# Altium PCB MCU_M_V1.PcbDoc
Units mm, origin at the board's own origin, x right, y up, seen from the top; angles counter-clockwise.
Board outline 26.88 x 19 mm, 2 copper layers (Top Layer, Bottom Layer); 22 components, 48 nets, 148 pads, 67 vias.
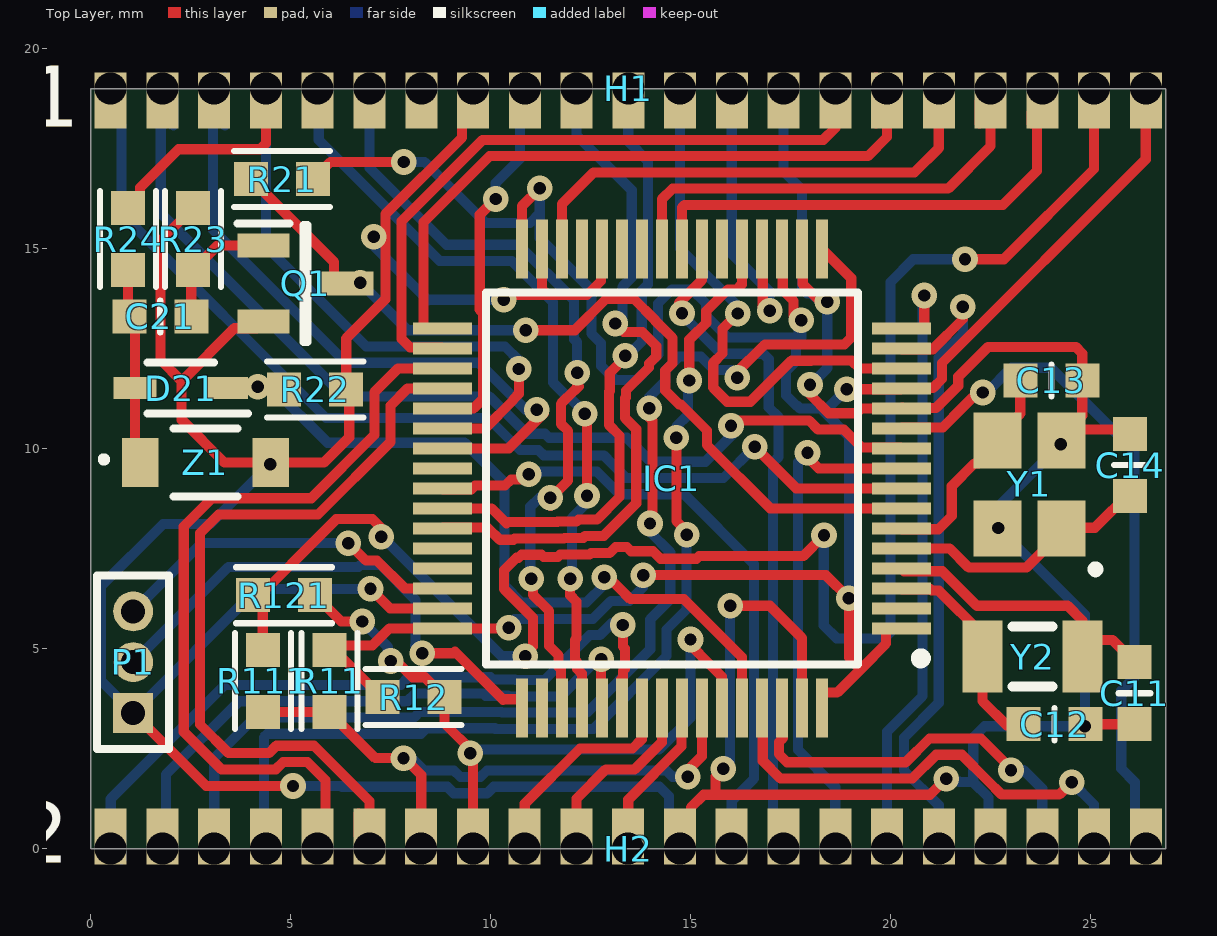
[diagram p0: Top Layer view]
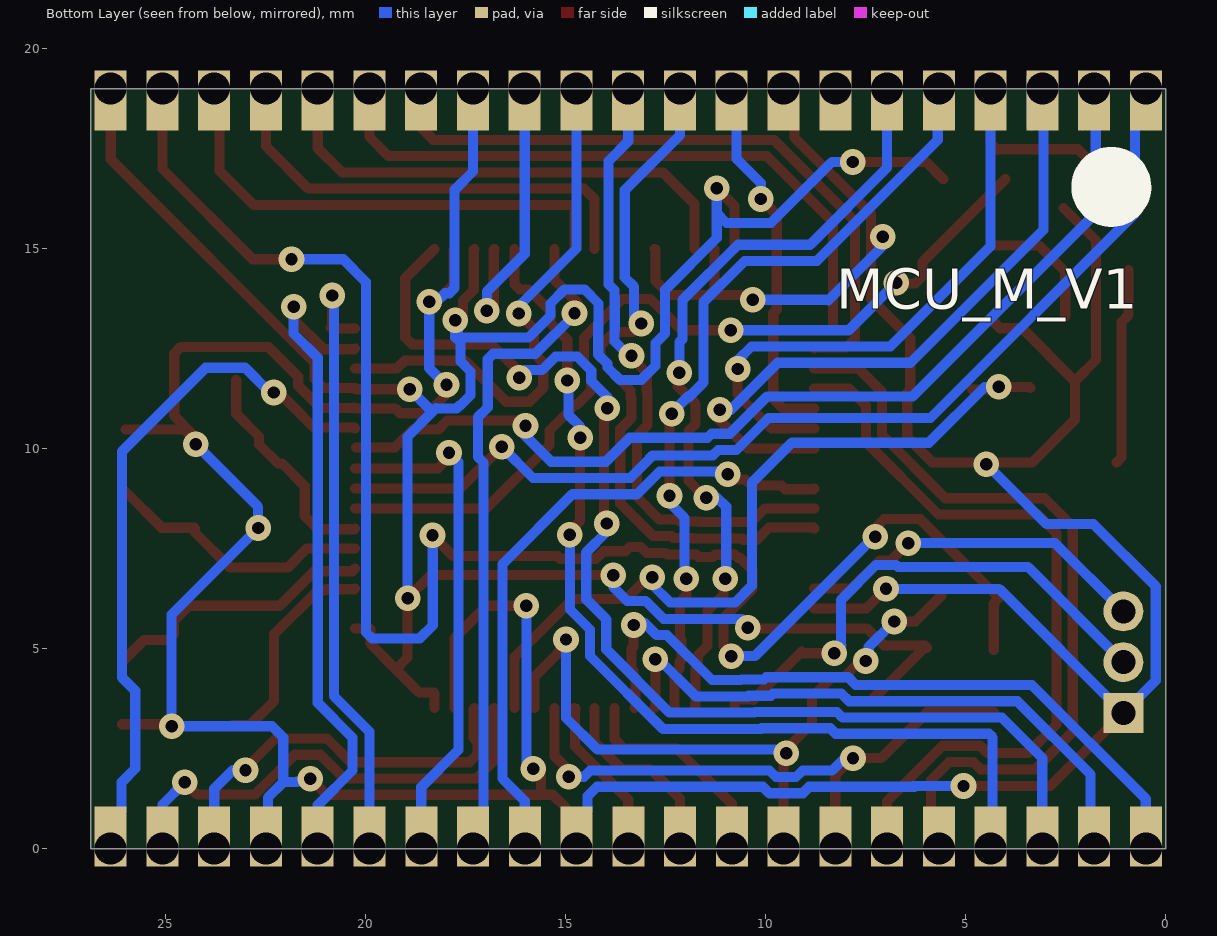
[diagram p1: Bottom Layer view, seen from below]
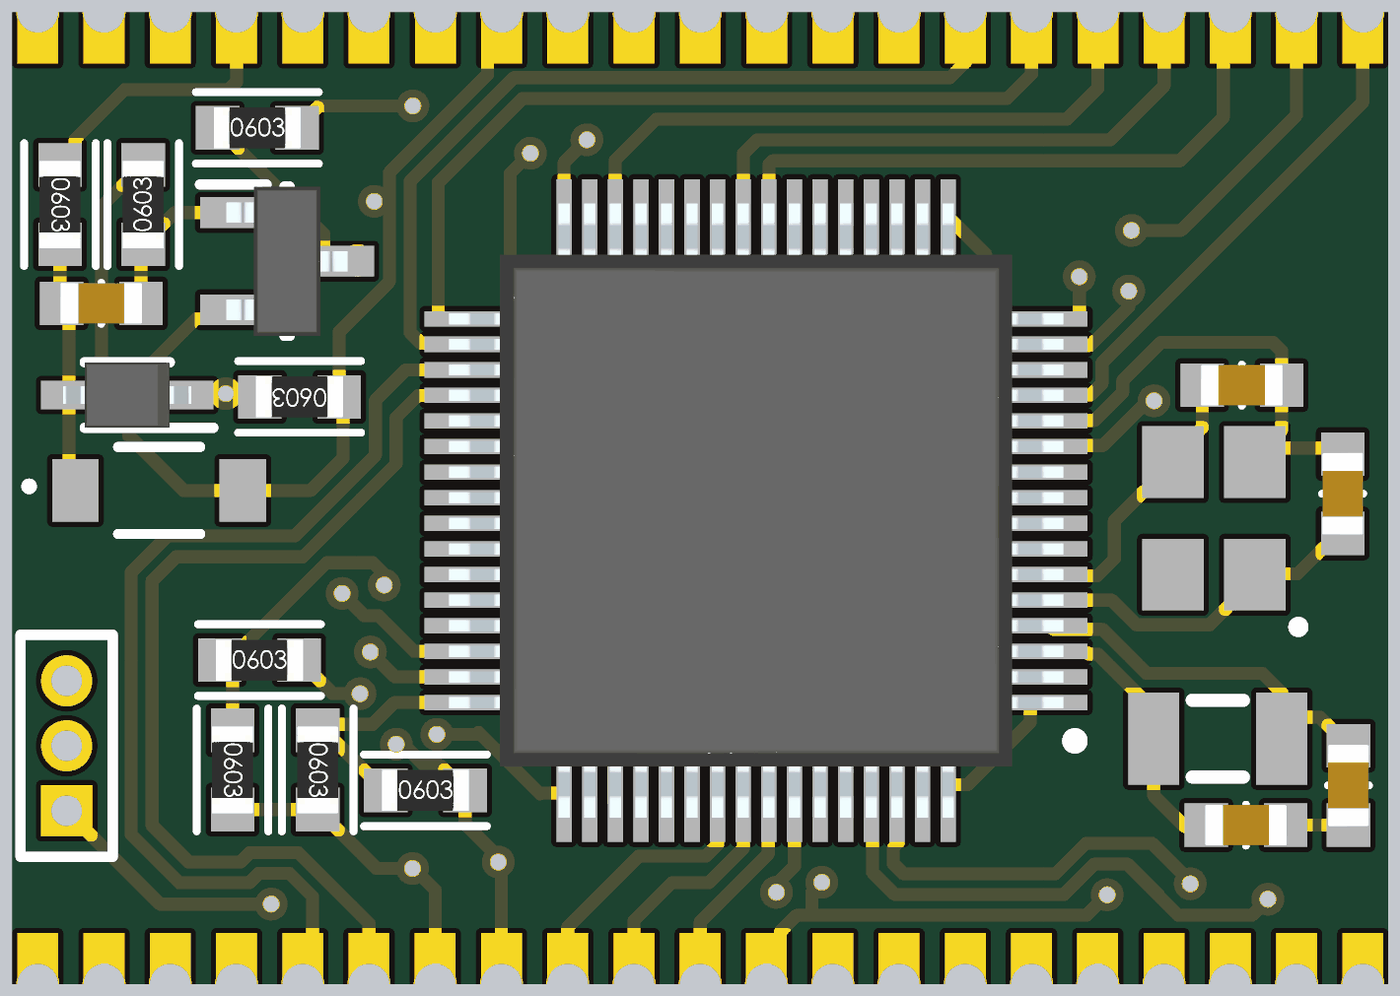
[diagram p2: 3D render of the assembled board from above, using the file's embedded part models]

## Layer stack, top to bottom
Top Solder: solder mask 0.0102, Solder Resist, Dk 3.5
Top Layer: signal copper 0.0356
Dielectric 1: dielectric 0.32, FR-4, Dk 4.8
Bottom Layer: signal copper 0.0356
Bottom Solder: solder mask 0.0102, Solder Resist, Dk 3.5

## Board outline
0,0 26.876,0 26.876,19 0,19

## Design rules (kind name [scope] priority, off if disabled: settings)
AssemblyTestPointUsage SilkToBoardRegionClearance_1 [All] p2:
AssemblyTestPointUsage SilkToBoardRegionClearance [All] p3:
Clearance [All] p1: gap=0.152 ignorepadtopadclearanceinfootprint=FALSE except(0: Arc-Hole Track-Hole SMDPad-Hole THPad-Hole Via-Hole Fill-Hole Poly-Hole Region-Hole Text-Hole)
FanoutControl Fanout_Default [All] p5: bgadir=In bgaviamode=Centered fanoutstyle=Auto fanoutdirection=Alternating viagrid=0.025 // Fanout_Default (Default Rule)
HoleSize [All] p1: absolutevalues=TRUE maxlimit=6.35 minlimit=0.3 maxpercent=80.000 minpercent=20.000
MatchedLengths DiffPair_DIFF100MatchedLengths [InDifferentialPairClass('DIFF100')] p1: tolerance=0.152 checknetsindiffpair=TRUE checkdiffpairvsdiffpair=FALSE checkxsignals=FALSE checkothers=FALSE usedelayunits=FALSE
MinimumSolderMaskSliver [All] p1: minsoldermaskwidth=0.05
MinimumSolderMaskSliver SilkscreenOverComponentPads_2 [All] p2: minsoldermaskwidth=0.254
MinimumSolderMaskSliver SilkToSolderMaskClearance_1 [IsPad] p3: minsoldermaskwidth=0.1
MinimumSolderMaskSliver SilkscreenOverComponentPads_1 [All] p4: minsoldermaskwidth=0.254
MinimumSolderMaskSliver SilkToSolderMaskClearance [IsPad] p5: minsoldermaskwidth=0.254
MinimumSolderMaskSliver SilkscreenOverComponentPads [All] p6: minsoldermaskwidth=0.254
PolygonConnect [All] p1: connectstyle=Direct reliefconductorwidth=0.254 reliefentries=4 polygonreliefangle="90 Angle" airgapwidth=0.254
RoomDefinition MCU_M_V1 [InComponentClass('MCU_M_V1')] p1: confinementstyle=ConfineIn formatcopy=TRUE lockcomponents=FALSE outline -0.076,-0.584 26.962,-0.584 26.962,19.558 -0.076,19.558
RoutingVias [All] p1: holewidth=0.305 width=0.635 viastyle="Through Hole" minholewidth=0.305 minwidth=0.635 maxholewidth=0.711 maxwidth=1.27
SMDNeckDown [All] p1: percent=90.000
SilkToBoardRegionClearance SilkToBoardRegionClearance_2 [All] p1:
SilkToSolderMaskClearance SilkToSolderMaskClearance_2 [IsPad] p1: minsilkscreentomaskgap=0.1 clearancetoexposedcopper=TRUE
SolderMaskExpansion [All] p1: expansion=0.102
Width [All] p1: maxlimit=2.54 minlimit=0.152 preferedwidth=0.254
25 further rules are at their usual default settings.

## Components (designator, comment, footprint, x,y, rotation, side; value= is the part's Value field where it differs from the comment)
C11 "5.6pF" SMD-0603C 26.098,3.886 r180 top
C12 "5.6pF" SMD-0603C 24.096,3.111 r270 top
C13 "5.6pF" SMD-0603C 24.016,11.709 r270 top
C14 "5.6pF" SMD-0603C 25.984,9.588 r0 top
C21 "0.10µF" SMD-0603C 1.74,13.31 r270 top
D21 "BAT60JFILM" SOD2513X117N 2.248,11.517 r180 top
H1 "CASTELLATED 21 pin" "CASTELLATED 21 pin" 26.378,19 r180 top locked
H2 "CASTELLATED 21 pin" "CASTELLATED 21 pin" 0.5,0 r0 top
IC1 "STM32F107RCT6" QFP50P1200X1200X160-64N 14.529,9.258 r180 top
P1 "MHDR1X3" MHDR1X3 1.064,3.392 r90 top
Q1 "IRLML6246TRPBF" SOT95P237X112-3N 5.368,14.133 r0 top
R11 "10k" SMD-0603-RES 5.967,4.19 r180 top
R12 "10k" SMD-0603-RES 8.071,3.791 r270 top
R21 "10k" SMD-0603-RES 4.788,16.739 r270 top
R22 "10k" SMD-0603-RES 5.613,11.481 r90 top
R23 "100k" SMD-0603-RES 2.559,15.24 r0 top
R24 "1k" SMD-0603-RES 0.933,15.24 r180 top
R111 "10k" SMD-0603-RES 4.304,4.19 r180 top
R121 "10k" SMD-0603-RES 4.829,6.337 r270 top
Y1 "NX3225GA-25.000M-STD-CRG-1" NX3225SA_1 23.47,9.106 r90 top
Y2 "NX3215SA-32.768K-STD-MUA-8" NX3215SA 23.546,4.801 r0 top
Z1 "BZT52-C3V6J" SOD123 2.87,9.652 r0 top

## Footprints (in the part's own frame and the unit in brackets; to place one, negate y for a bottom-side part, rotate by r counter-clockwise, add the part's x,y. Pads: shape width x height; smd on the part's side, far side on the other; paste and mask are expansions set on the pad)
"CASTELLATED 21 pin" [mm]
  rect 0.8x1.4 / inner rect 0.8x1.5 / far side rect 0.8x1.5 hole 0.8 copper offset 0,0.3: 1(0,0) 2(1.294,0) 3(2.587,0) 4(3.881,0) 5(5.175,0) 6(6.469,0) 7(7.762,0) 8(9.056,0) 9(10.35,0) 10(11.644,0) 11(12.938,0) 12(14.232,0) 13(15.526,0) 14(16.82,0) 15(18.114,0) 16(19.408,0) 17(20.702,0) 18(21.996,0) 19(23.29,0) 20(24.584,0) 21(25.878,0)
MHDR1X3 [mm] "Connector; Header; 3 Position"
  rect 1x1 hole 0.6: 1(0,0)
  round 1 hole 0.6: 2(1.27,0) 3(2.54,0)
  silkscreen extent -0.9,-0.9 3.44,0.9
NX3215SA [mm]
  rect 1x1.8 smd: 1(-1.25,0) 2(1.25,0)
  silkscreen extent -0.5,-0.75 0.5,0.75
NX3225SA_1 [mm]
  rect 1.4x1.2 smd: 1(-1.1,-0.8) 2(1.1,-0.8) 3(1.1,0.8) 4(-1.1,0.8)
  silkscreen extent -2.19,-1.72 -2.05,-1.58
QFP50P1200X1200X160-64N [mm]
  rect 1.475x0.3 smd: 1(-5.738,3.75) 2(-5.738,3.25) 3(-5.738,2.75) 4(-5.738,2.25) 5(-5.738,1.75) 6(-5.738,1.25) 7(-5.738,0.75) 8(-5.738,0.25) 9(-5.738,-0.25) 10(-5.738,-0.75) 11(-5.738,-1.25) 12(-5.738,-1.75) 13(-5.738,-2.25) 14(-5.738,-2.75) 15(-5.738,-3.25) 16(-5.738,-3.75) 33(5.738,-3.75) 34(5.738,-3.25) 35(5.738,-2.75) 36(5.738,-2.25) 37(5.738,-1.75) 38(5.738,-1.25) 39(5.738,-0.75) 40(5.738,-0.25) 41(5.738,0.25) 42(5.738,0.75) 43(5.738,1.25) 44(5.738,1.75) 45(5.738,2.25) 46(5.738,2.75) 47(5.738,3.25) 48(5.738,3.75)
  rect 0.3x1.475 smd: 17(-3.75,-5.738) 18(-3.25,-5.738) 19(-2.75,-5.738) 20(-2.25,-5.738) 21(-1.75,-5.738) 22(-1.25,-5.738) 23(-0.75,-5.738) 24(-0.25,-5.738) 25(0.25,-5.738) 26(0.75,-5.738) 27(1.25,-5.738) 28(1.75,-5.738) 29(2.25,-5.738) 30(2.75,-5.738) 31(3.25,-5.738) 32(3.75,-5.738) 49(3.75,5.738) 50(3.25,5.738) 51(2.75,5.738) 52(2.25,5.738) 53(1.75,5.738) 54(1.25,5.738) 55(0.75,5.738) 56(0.25,5.738) 57(-0.25,5.738) 58(-0.75,5.738) 59(-1.25,5.738) 60(-1.75,5.738) 61(-2.25,5.738) 62(-2.75,5.738) 63(-3.25,5.738) 64(-3.75,5.738)
  silkscreen extent -6.35,-4.65 4.65,4.65, body extent -6,-6 6,6, height 1.6
SMD-0603-RES [mm]
  rect 0.85x0.85 smd: 1(0,0.775) 2(0,-0.775)
  silkscreen extent -0.7,-1.2 0.7,1.2, body extent -0.4,-0.85 0.4,0.85, height 0.56
SMD-0603C [mm]
  rect 0.85x0.85 smd: 1(0,0.775) 2(0,-0.775)
  silkscreen extent -0.4,0 0.4,0, body extent -0.4,-0.8 0.4,0.8, height 0.9
SOD123 [mm]
  rect 0.91x1.22 smd: 1(-1.635,0) 2(1.635,0)
  silkscreen extent -2.59,-0.85 0.8,0.85
SOD2513X117N [mm]
  rect 1.085x0.55 smd: 1(-1.14,0) 2(1.14,0)
  silkscreen extent -1.68,-0.64 0.83,0.64, body extent -1.25,-0.64 1.25,0.64, height 1.17
SOT95P237X112-3N [mm]
  rect 1.3x0.6 smd: 1(-1.05,0.95) 2(-1.05,-0.95) 3(1.05,0)
  silkscreen extent -1.7,-1.46 0.05,1.5, body extent -1.18,-1.46 1.18,1.46, height 1.12

## Part data
C11 C12 C13 C14: library part GRM1885C1H5R6CA01D, "CAP CER 5.6PF 50V NP0 0603", Digi-Key Part Number=490-12723-1-ND, Manufacturer="Murata Electronics North America", Operating Temperature="-55°C ~ 125°C", Package / Case="0603 (1608 Metric)", Ratings=-, Supplier Part Number 1=81-GRM1885C1H5R6CA1D, Temperature Coefficient="C0G, NP0", Tolerance=±0.25pF, Voltage=50V, @ qty=0, Applications="General Purpose", Datasheets=http://www.murata.com/~/media/webrenewal/support/library/catalog/products/capacitor/mlcc/c02e.pdf, Factory Stock=0, Features=-, Height - Seated (Max)=-, Image=//media.digikey.com/Renders/Murata%20Renders/ZRB-SERIES-0402.jpg, Lead Spacing=-, Lead Style=-, Minimum Quantity=1, Mounting Type="Surface Mount, MLCC", Packaging="Cut Tape (CT)", Part Number=GRM1885C1H5R6CA01D, Part Status=Active, Quantity Available=10409, Series=GRM, Size / Dimension="0.063\" L x 0.031\" W (1.60mm x 0.80mm)", Supplier 1=Mouser, Thickness (Max)="0.035\" (0.90mm)", Unit Price (USD)=0.12
C21: library part GCJ188R71H104KA12D, "CAP CER 0.1UF 50V X7R 0603", Digi-Key Part Number=490-5798-1-ND, Manufacturer="Murata Electronics North America", Operating Temperature="-55°C ~ 125°C", Package / Case="0603 (1608 Metric)", Ratings=AEC-Q200, Supplier Part Number 1=81-GCJ188R71H104KA2D, Temperature Coefficient=X7R, Tolerance=±10%, Voltage=50V, @ qty=0, Applications="Automotive, Boardflex Sensitive", Datasheets=http://www.murata.com/~/media/webrenewal/support/library/catalog/products/capacitor/mlcc/c03e.ashx, Factory Stock=0, Features="Soft Termination", Height - Seated (Max)=-, Image=//media.digikey.com/Renders/Murata%20Renders/0603%28LQG18%29.jpg, Lead Spacing=-, Lead Style=-, Minimum Quantity=1, Mounting Type="Surface Mount, MLCC", Packaging="Cut Tape (CT)", Part Number=GCJ188R71H104KA12D, Part Status=Active, Quantity Available=163695, Series=GCJ, Size / Dimension="0.063\" L x 0.031\" W (1.60mm x 0.80mm)", Supplier 1=Mouser, Thickness (Max)="0.035\" (0.90mm)", Unit Price (USD)=0.12
D21: "Diode", Manufacturer_Name=STMicroelectronics, Mouser2 Part Number=511-BAT60JFILM, Datasheet Link=https://componentsearchengine.com/Datasheets/1/BAT60JFILM.pdf, Height=1.17mm, Manufacturer_Part_Number=BAT60JFILM, Mouser2 Price/Stock=https://www.mouser.com/Search/Refine.aspx?Keyword=511-BAT60JFILM, Supplier 1=Mouser, Supplier Part Number 1=511-BAT60JFILM
IC1: "Integrated Circuit", Manufacturer_Name=STMicroelectronics, Mouser2 Part Number=511-STM32F107RCT6, Datasheet Link=https://componentsearchengine.com/Datasheets/1/STM32F107RCT6.pdf, Height=1.6mm, Manufacturer_Part_Number=STM32F107RCT6, Mouser2 Price/Stock=https://www.mouser.com/Search/Refine.aspx?Keyword=511-STM32F107RCT6, Supplier 1=Mouser, Supplier Part Number 1=511-STM32F107RCT6
P1: "Header, 3-Pin", LatestRevisionDate=17-Jul-2002, LatestRevisionNote="Re-released for DXP Platform.", Publisher="Altium Limited"
Q1: "MOSFET (N-Channel)", Manufacturer_Name=Infineon, Supplier Part Number 1=942-IRLML6246TRPBF, Height=1.12mm, Manufacturer_Part_Number=IRLML6246TRPBF, Supplier 1=Mouser
R11 R12 R21 R22 R111 R121: library part ERJ-3EKF1002V, "RES SMD 10K OHM 1% 1/10W 0603", Digi-Key Part Number=P10.0KHCT-ND, Manufacturer="Panasonic Electronic Components", Operating Temperature="-55°C ~ 155°C", Package / Case="0603 (1608 Metric)", Power (Watts)="0.1W, 1/10W", Supplier Device Package=0603, Supplier Part Number 1=667-ERJ-3EKF1002V, Temperature Coefficient=±100ppm/°C, Tolerance=±1%, @ qty=1500, Composition="Thick Film", Datasheets=http://industrial.panasonic.com/www-cgi/jvcr13pz.cgi?E+PZ+3+AOA0002+ERJ3EKF1002V+7+WW, Factory Stock=0, Failure Rate=-, Features="Automotive AEC-Q200", Height - Seated (Max)="0.022\" (0.55mm)", Image=//media.digikey.com/Photos/Panasonic%20Photos/MFG_ERJ-P6W%20Series.jpg, Minimum Quantity=1, Number of Terminations=2, Packaging="Cut Tape (CT)", Part Number=ERJ-3EKF1002V, Part Status=Active, Quantity Available=6703141, Series=ERJ, Size / Dimension="0.063\" L x 0.031\" W (1.60mm x 0.80mm)", Supplier 1=Mouser, Unit Price (USD)=0.00379
R23: library part ERJ-3EKF1003V, "RES SMD 100K OHM 1% 1/10W 0603", Digi-Key Part Number=P100KHCT-ND, Manufacturer="Panasonic Electronic Components", Operating Temperature="-55°C ~ 155°C", Package / Case="0603 (1608 Metric)", Power (Watts)="0.1W, 1/10W", Supplier Device Package=0603, Supplier Part Number 1=667-ERJ-3EKF1003V, Temperature Coefficient=±100ppm/°C, Tolerance=±1%, @ qty=1500, Composition="Thick Film", Datasheets=http://industrial.panasonic.com/www-cgi/jvcr13pz.cgi?E+PZ+3+AOA0002+ERJ3EKF1003V+7+WW, Factory Stock=0, Failure Rate=-, Features="Automotive AEC-Q200", Height - Seated (Max)="0.022\" (0.55mm)", Image=//media.digikey.com/Photos/Panasonic%20Photos/MFG_ERJ-P6W%20Series.jpg, Minimum Quantity=1, Number of Terminations=2, Packaging="Cut Tape (CT)", Part Number=ERJ-3EKF1003V, Part Status=Active, Quantity Available=2179804, Series=ERJ, Size / Dimension="0.063\" L x 0.031\" W (1.60mm x 0.80mm)", Supplier 1=Mouser, Unit Price (USD)=0.00379
R24: library part ERJ-3EKF1001V, "RES SMD 1K OHM 1% 1/10W 0603", Digi-Key Part Number=P1.00KHCT-ND, Manufacturer="Panasonic Electronic Components", Operating Temperature="-55°C ~ 155°C", Package / Case="0603 (1608 Metric)", Power (Watts)="0.1W, 1/10W", Supplier Device Package=0603, Supplier Part Number 1=667-ERJ-3EKF1001V, Temperature Coefficient=±100ppm/°C, Tolerance=±1%, @ qty=1500, Composition="Thick Film", Datasheets=http://industrial.panasonic.com/www-cgi/jvcr13pz.cgi?E+PZ+3+AOA0002+ERJ3EKF1001V+7+WW, Factory Stock=0, Failure Rate=-, Features="Automotive AEC-Q200", Height - Seated (Max)="0.022\" (0.55mm)", Image=//media.digikey.com/Photos/Panasonic%20Photos/MFG_ERJ-P6W%20Series.jpg, Minimum Quantity=1, Number of Terminations=2, Packaging="Cut Tape (CT)", Part Number=ERJ-3EKF1001V, Part Status=Active, Quantity Available=5218845, Series=ERJ, Size / Dimension="0.063\" L x 0.031\" W (1.60mm x 0.80mm)", Supplier 1=Mouser, Unit Price (USD)=0.00379
Y1: "Crystal or Oscillator", Manufacturer_Name=NDK, Mouser2 Part Number=344-NX3225GA25MSTRG1, Datasheet Link=https://componentsearchengine.com/Datasheets/1/NX3225GA-25.000M-STD-CRG-1.pdf, Manufacturer_Part_Number=NX3225GA-25.000M-STD-CRG-1, Mouser2 Price/Stock=https://www.mouser.com/Search/Refine.aspx?Keyword=344-NX3225GA25MSTRG1, Supplier 1=Mouser, Supplier Part Number 1=344-NX3225GA25MSTRG1
Y2: "Crystal or Oscillator", Manufacturer_Name=NDK, Mouser2 Part Number=344-NX3215SA32768K8, Datasheet Link=https://componentsearchengine.com/Datasheets/1/NX3215SA-32.768K-STD-MUA-8.pdf, Manufacturer_Part_Number=NX3215SA-32.768K-STD-MUA-8, Mouser2 Price/Stock=https://www.mouser.com/Search/Refine.aspx?Keyword=344-NX3215SA32768K8, Supplier 1=Mouser, Supplier Part Number 1=344-NX3215SA32768K8
Z1: "Zener Diode", Manufacturer_Name=Nexperia, Mouser2 Part Number=771-BZT52-C3V6J, Datasheet Link=https://componentsearchengine.com/Datasheets/1/BZT52-C3V6J.pdf, Manufacturer_Part_Number=BZT52-C3V6J, Mouser2 Price/Stock=https://www.mouser.com/Search/Refine.aspx?Keyword=771-BZT52-C3V6J, Supplier 1=Mouser, Supplier Part Number 1=771-BZT52-C3V6J

## Via types
v1: diameter 0.64, hole 0.31, Top Layer to Bottom Layer, tented both sides, 67 vias

## Nets (pads, with @x,y where several pads share a name; then routed paths per layer and width w, separated by ;. In a path a pad name is that pad's centre, name@x,y a point inside that pad or via, vN(x,y) a via of type N, cw(c..) or ccw(c..) an arc to the next point about the centre after c; other vN are vias at no path point)
ADC1: H2.4 IC1.21 | length 25.3
  Top Layer w0.254: v1(14.643,10.274) 14.643,8.19 14.897,7.936 v1(14.897,7.849) ; v1(14.964,11.705) 14.964,12.722 15.026,12.784 15.031,12.784 15.391,13.144 15.391,13.44 15.93,13.979 16.15,13.979 16.279,14.108 IC1.21
  Bottom Layer w0.254: H2.4 4.329,0.052 4.329,2.783 4.421,2.875 8.255,2.875 8.39,3.01 10.1,3.01 10.114,2.996 12.574,2.996 14.395,4.817 14.395,5.478 14.897,5.98 v1(14.897,7.849) ; v1(14.643,10.274) 14.643,10.554 14.929,10.84 14.929,11.503 v1@15.131,11.705 ; v1(14.964,11.705) v1@15.131,11.705 ; v1@15.133,11.707 v1@15.131,11.705
ADC2: H2.3 IC1.17 | length 30.1
  Top Layer w0.254: v1(13.96,11.012) 13.96,10.781 14.044,10.697 14.044,8.217 13.956,8.129 v1(13.982,8.129) ; v1(16.163,11.774) 16.163,11.823 16.117,11.869 16.854,12.607 17.838,12.607 17.839,12.608 18.843,12.608 19.014,12.779 19.014,14.261 IC1.17
  Bottom Layer w0.254: H2.3 3.088,2.267 4.102,3.281 8.086,3.281 8.222,3.416 10.268,3.416 10.282,3.402 12.406,3.402 13.989,4.985 13.989,5.734 14.491,6.236 14.491,7.407 13.97,7.928 13.982,7.94 v1(13.982,8.129) ; v1(13.96,11.012) 13.96,11.286 14.365,11.692 14.365,11.953 14.716,12.304 15.255,12.304 15.592,11.967 16.019,11.967 16.163,11.823 v1(16.163,11.774)
ADC3: H1.9 IC1.20 | length 7.7
  Top Layer w0.254: IC1.20 16.8,14.975 16.8,13.471 16.825,13.446 v1(16.973,13.446)
  Bottom Layer w0.254: H1.9 16.028,14.871 16.7,14.199 16.973,13.926 v1(16.973,13.446)
ADC4: H1.10 IC1.14 | length 14
  Top Layer w0.254: v1@16.017,13.429 16.067,13.379 v1(16.177,13.379) 15.797,12.999 15.797,12.379 15.564,12.146 15.564,11.526 15.915,11.175 16.491,11.175 17.516,12.2 18.006,12.2 18.007,12.201 19.029,12.201 19.222,12.008 IC1.14
  Bottom Layer w0.254: H1.10 14.734,15.006 16.285,13.456 16.208,13.379 16.205,13.382 16.202,13.379 v1(16.177,13.379)
B1: H2.7 IC1.58 R11.1 R111.1 | length 15.9
  Top Layer w0.254: R111.1 R11.1 7.118,2.264 v1(7.819,2.264) 7.83,2.275 8.263,1.842 H2.7 ; v1(14.927,1.798) 14.927,1.957 15.279,2.309 IC1.58
  Bottom Layer w0.254: v1(7.819,2.264) 7.819,2.269 7.814,2.275 7.918,2.379 8.341,1.956 9.081,1.956 9.246,1.791 9.742,1.791 9.907,1.956 14.389,1.956 14.547,1.798 v1(14.927,1.798)
B2: H2.8 IC1.59 R12.1 R121.1 | length 18.5
  Top Layer w0.254: R121.1 6.261,5.68 v1(6.793,5.68) ; v1(7.502,4.693) 7.639,4.693 8.046,4.286 8.351,4.286 R12.1 8.846,3.13 9.556,2.42 H2.8 ; v1(14.994,5.23) 14.923,5.159 15.545,4.537 15.779,4.303 IC1.59
  Bottom Layer w0.254: v1(6.793,5.68) 7.428,5.045 7.428,4.767 v1(7.502,4.693) ; v1(9.494,2.39) 9.494,2.482 14.211,2.482 14.994,3.265 v1(14.994,5.23)
B3: H2.9 IC1.55 | length 5.5
  Top Layer w0.254: H2.9 10.85,1.122 12.232,2.503 13.545,2.503 13.779,2.738 IC1.55
B4: H2.11 IC1.57 | length 4.1
  Top Layer w0.254: H2.11 13.438,1.224 14.767,2.553 IC1.57@14.767,3.509 ; IC1.57@14.756,3.497 IC1.57@14.767,3.509 ; IC1.57 IC1.57@14.767,3.509
B5: H2.10 IC1.56 | length 4.8
  Top Layer w0.254: H2.10 12.144,1.247 12.88,1.983 13.599,1.983 14.273,2.657 14.279,2.657 IC1.56
BOOT0: D21.1 IC1.60 R22.1 | length 20.1
  Top Layer w0.254: D21.1 3.415,11.544 v1(4.173,11.544) 4.173,11.46 4.194,11.481 R22.1 ; v1(12.844,6.79) 12.932,6.79 12.936,6.795 13.203,6.528 13.492,6.239 14.833,6.239 16.279,4.793 IC1.60
  Bottom Layer w0.254: v1(4.173,11.544) 4.531,11.544 5.928,10.147 9.349,10.147 10.348,9.148 10.348,6.574 10.771,6.152 11.267,6.152 11.268,6.153 12.391,6.153 12.844,6.605 v1(12.844,6.79) v1@12.844,6.963
D1-1: H1.18 IC1.38 R24.2 | length 20.2
  Top Layer w0.254: R24.2 1.232,16.313 1.232,16.522 2.197,17.488 4.233,17.488 4.382,17.637 H1.18 ; IC1.38 9.861,10.508 10.556,11.204 10.556,11.221 10.705,11.37 v1(10.705,11.992)
  Bottom Layer w0.254: H1.18 4.382,15.062 6.889,12.555 10.359,12.555 10.705,12.208 v1(10.705,11.992)
D1-2: H1.19 IC1.39 | length 19.2
  Top Layer w0.254: IC1.39 10.453,10.008 11.328,10.884 11.24,10.972 v1(11.155,10.972)
  Bottom Layer w0.254: v1(11.155,10.972) 10.877,10.972 9.701,12.148 6.381,12.148 3.061,15.469 3.061,18.973 H1.19 ; H1.19 3.361,19.273 3.361,18.077 3.088,18.35 H1.19
ETH_CLKLN: H2.13 IC1.41 | length 16.6
  Top Layer w0.254: IC1.41 8.814,8.985 9.522,8.985 9.615,9.079 10.359,9.079 10.507,9.227 11.043,9.227 10.947,9.322 v1(10.947,9.36)
  Bottom Layer w0.254: v1(10.947,9.36) 10.947,9.341 11.049,9.239 11.236,9.426 12.657,9.426 13.221,8.862 14.836,8.862 16.584,7.114 16.584,1.751 16.026,1.192 H2.13
ETH_CRS: H2.14 IC1.23 | length 17.2
  Top Layer w0.254: v1(14.782,13.383) 14.782,13.563 14.705,13.64 15.279,14.214 IC1.23
  Bottom Layer w0.254: v1(14.782,13.383) 14.726,13.383 14.705,13.362 14.772,13.362 15.761,12.373 16.815,12.373 16.954,12.234 16.954,11.03 17.198,10.785 17.198,9.797 17.057,9.656 17.057,0.263 H2.14
ETH_MDC: H2.15 IC1.9 | length 12.9
  Top Layer w0.254: v1(17.921,9.895) 17.921,9.784 18.197,9.508 IC1.9
  Bottom Layer w0.254: v1(17.921,9.895) 17.687,9.661 17.687,2.467 18.614,1.54 H2.15
ETH_MDIO: H2.16 IC1.16 | length 15.7
  Top Layer w0.254: IC1.16 20.854,13.008 20.877,13.031 20.841,13.068 v1(20.841,13.83)
  Bottom Layer w0.254: H2.16 19.908,2.927 20.796,3.815 20.796,13.785 v1(20.841,13.83)
ETH_NRST: H1.21 IC1.8 | length 26.2
  Top Layer w0.254: v1(16.599,10.046) 17.636,9.008 IC1.8
  Bottom Layer w0.254: H1.21 0.5,18.35 0.773,18.077 0.773,15.877 5.883,10.767 9.933,10.767 10.733,9.967 11.188,9.967 11.323,9.832 12.826,9.832 13.031,9.627 13.389,9.268 15.822,9.268 v1(16.599,10.046)
ETH_PHYAD0: H1.20 IC1.10 | length 26.5
  Top Layer w0.254: v1(16.008,10.575) 16.008,10.631 16.081,10.704 17.96,10.704 18.186,10.477 18.831,10.477 19.277,10.031 IC1.10@20.244,10.031
  Bottom Layer w0.254: H1.20@1.862,18.282 H1.20@1.931,18.214 ; v1(16.008,10.575) 16.008,10.383 16.04,10.351 15.364,9.675 13.998,9.675 13.773,9.9 13.401,10.272 11.458,10.272 11.357,10.373 10.902,10.373 9.974,11.301 6.339,11.301 1.753,15.888 1.753,18.036 H1.20@1.931,18.214 ; H1.20@1.931,18.214 2.067,18.077 2.067,18.727 H1.20 1.794,18.35 H1.20@1.931,18.214
ETH_REFCLO: H2.17 IC1.15 | length 16.7
  Top Layer w0.254: IC1.15 20.29,12.485 21.051,12.485 21.806,13.24 v1(21.806,13.551)
  Bottom Layer w0.254: H2.17 21.202,1.085 20.333,1.954 20.333,2.777 21.202,3.646 21.202,12.274 21.806,12.878 v1(21.806,13.551)
ETH_RXD0: H1.3 IC1.24 | length 13.1
  Top Layer w0.254: IC1.24 14.779,16.023 14.85,16.095 22.806,16.095 23.654,16.943 H1.3@23.654,18.264 ; H1.3 23.791,18.4 H1.3@23.654,18.264 ; H1.3@23.654,18.264 23.518,18.4 23.518,18.127 H1.3@23.654,18.264
ETH_RXD1: H1.4 IC1.25 | length 12.8
  Top Layer w0.254: IC1.25 14.279,16.235 14.546,16.501 21.435,16.501 22.497,17.563 H1.4@22.497,18.4 ; H1.4 H1.4@22.497,18.4 ; H1.4@22.497,18.4 22.224,18.673 22.224,18.127 H1.4@22.497,18.4
ETH_TXD0: H1.6 IC1.33 | length 18.2
  Top Layer w0.254: IC1.33@8.333,13.027 8.319,13.041 8.319,15.665 9.968,17.314 19.433,17.314 19.909,17.79 H1.6@19.909,18.4 ; H1.6@19.909,18.4 H1.6 19.636,19.273 19.636,18.127 H1.6@19.909,18.4
ETH_TXD1: H1.7 IC1.34 | length 16.9
  Top Layer w0.254: IC1.34 8.768,12.531 7.985,12.531 7.773,12.744 7.773,15.693 9.8,17.721 18.318,17.721 18.616,18.019 H1.7
ETH_TXEN: H1.5 IC1.30 | length 12.6
  Top Layer w0.254: IC1.30 11.779,16.109 12.577,16.908 20.597,16.908 21.203,17.514 H1.5
GND: C11.1 C12.1 C13.1 C14.1 H1.8 H1.14 H2.12 H2.18 IC1.12 IC1.18 IC1.28 IC1.31 IC1.47 IC1.63 P1.1 Q1.2 R22.2 R23.1 Y1.2 Y1.4 Z1.2 | length 121.5
  Top Layer w0.254: P1.1 2.888,1.568 v1(5.059,1.568) ; R23.1 1.747,15.203 1.747,12.216 2.273,11.69 ; Q1.2 4.145,13.01 3.593,13.01 2.273,11.69 ; v1(6.995,6.495) 7.482,6.008 IC1.47 ; v1(7.073,15.303) v1@7.366,15.303 ; H1.14 9.285,18.727 9.285,17.78 7.366,15.862 v1@7.366,15.303 ; v1@10.537,13.842 11.428,13.842 ; IC1.31 11.279,13.991 11.428,13.842 ; IC1.28 12.756,14.973 12.756,14.191 12.407,13.842 11.428,13.842 ; H2.12 15.005,0.273 15.005,1.029 15.325,1.349 15.62,1.349 ; v1(15.812,1.995) 15.62,1.803 15.62,1.349 ; v1(15.985,6.073) 16.977,6.073 17.779,5.271 IC1.63 ; IC1.18 17.802,14.973 17.802,14.113 18.237,13.678 v1(18.415,13.678) ; v1(17.984,11.601) 17.984,11.354 18.451,10.886 19.146,10.886 19.268,11.008 IC1.12 IC1.12@20.278,11.02 ; IC1.12@20.29,11.031 IC1.12@20.278,11.02 ; v1(21.385,1.75) 20.984,1.349 15.62,1.349 ; C12.1 C11.1 ; C14.1@26.01,10.481 24.545,10.481 Y1.2 24.27,10.306 24.791,10.827 C13.1 24.791,12.38 24.625,12.546 22.439,12.546 21.69,11.797 21.69,11.574 21.136,11.02 IC1.12@20.278,11.02 ; 2.273,11.69 2.273,10.725 3.346,9.652 Z1.2 5.829,9.652 6.464,10.287 6.464,11.405 R22.2 6.388,12.758 7.366,13.736 v1@7.366,15.303
  Bottom Layer w0.254: v1(4.485,9.614) 2.984,8.113 1.807,8.113 0.252,6.558 0.252,4.204 P1.1 4.167,6.495 v1(6.995,6.495) ; v1(5.059,1.568) 6.307,1.568 6.288,1.549 8.912,1.549 9.077,1.384 9.911,1.384 10.076,1.549 14.221,1.549 14.459,1.311 14.459,0.923 14.732,0.65 H2.12 ; v1(7.073,15.303) 7.073,15.067 8.431,13.709 8.447,13.725 v1(10.326,13.725) ; v1(15.812,1.995) 15.985,2.168 v1(15.985,6.073) ; H1.8 17.322,16.93 17.78,16.472 17.78,14.021 17.913,13.887 18.014,13.887 18.223,13.678 v1(18.415,13.678) 18.415,12.014 18.002,11.601 v1(17.984,11.601) ; v1(21.385,1.75) 21.459,1.676 21.716,1.676 21.727,1.665 22.063,1.665 ; H2.18 22.446,0.05 22.446,1.282 22.063,1.665 ; v1(24.255,10.108) 22.692,8.545 v1(22.692,8.016) 24.856,5.852 v1(24.856,3.062) 22.347,3.062 22.063,2.778 22.063,1.665
M1_D1: H2.2 IC1.53 | length 15.6
  Top Layer w0.254: v1@12.756,4.753 12.756,3.543 IC1.53
  Bottom Layer w0.254: H2.2 H2.2@1.794,0.35 ; H2.2@1.794,0.65 H2.2@1.794,0.35 ; v1(12.76,4.74) 12.707,4.74 12.694,4.753 11.749,3.809 10.451,3.809 10.437,3.823 9.876,3.823 9.819,3.88 8.111,3.88 7.918,3.687 3.712,3.687 1.88,1.855 1.88,0.436 H2.2@1.794,0.35
M1_D2: H2.1 IC1.54 | length 19.6
  Top Layer w0.254: IC1.54 13.256,3.543 13.256,4.232 13.304,4.28 13.304,4.436 13.359,4.491 13.359,4.504 13.359,5.001 13.304,5.057 v1(13.304,5.591)
  Bottom Layer w0.254: v1(13.304,5.591) 13.075,5.591 13.027,5.639 12.728,5.34 12.469,5.34 11.344,4.215 10.619,4.215 10.605,4.229 10.045,4.229 9.987,4.286 7.943,4.286 7.75,4.094 3.348,4.094 0.5,1.246 H2.1@0.5,0.65 ; H2.1@0.5,0.65 0.535,0.684 0.773,0.446 0.773,-0.273 H2.1 H2.1@0.5,0.65
M1_D7: H1.13 IC1.37 | length 9.4
  Top Layer w0.254: IC1.37 9.573,11.008 9.815,11.25 9.815,13.388 9.727,13.477 9.727,15.848 v1(10.122,16.243)
  Bottom Layer w0.254: v1(10.122,16.243) 10.122,16.637 10.731,17.247 10.731,18.879 H1.13
M3_D1: H1.16 IC1.51 | length 20.6
  Top Layer w0.254: v1(11.019,6.751) 11.019,6.862 11.026,6.869 11.054,6.869 11.054,6.347 11.461,5.941 11.461,5.069 11.699,4.831 11.699,4.547 11.754,4.492 11.754,4.323 11.754,3.545 IC1.51 ; v1(11.485,8.777) 11.485,8.63 11.461,8.606 11.495,8.571 11.615,8.692 11.519,8.788 11.935,9.205 11.935,10.442 11.755,10.623 11.755,11.12 12.106,11.471 12.118,11.471 12.201,11.554 12.16,11.595 v1(12.16,11.899)
  Bottom Layer w0.254: H1.16 6.97,17.023 8.893,15.1 10.697,15.1 12.086,13.711 12.086,12.737 ; v1(11.019,6.751) 10.991,6.779 10.991,8.548 11.22,8.777 v1(11.485,8.777) ; 12.111,12.712 12.16,12.663 v1(12.16,11.899)
M3_D2: H1.17 IC1.52 | length 19.8
  Top Layer w0.254: v1(11.985,6.752) 11.985,6.333 12.145,6.174 12.145,5.251 12.105,5.212 12.105,4.715 12.16,4.66 12.16,4.491 12.279,4.373 IC1.52 ; v1(12.354,10.871) 12.375,10.871 12.408,10.839 v1(12.408,8.826)
  Bottom Layer w0.254: H1.17 5.701,18.975 5.701,17.718 8.725,14.694 10.528,14.694 11.561,13.661 11.561,11.651 11.912,11.3 11.953,11.3 12.375,10.877 12.369,10.871 v1(12.354,10.871) ; v1(11.985,6.752) 11.985,6.93 v1@12.031,6.976 ; v1@12.031,6.934 v1@12.031,6.976 ; v1(12.408,8.826) 12.408,8.647 12.031,8.27 v1@12.031,6.976
M3_D7: H2.6 IC1.36 | length 20.6
  Top Layer w0.254: 5.682,8.355 7.499,10.172 7.499,11.081 7.927,11.508 IC1.36 ; 5.682,8.356 3.201,8.356 2.732,7.888 2.732,3.107 3.45,2.389 4.458,2.389 4.642,2.574 5.584,2.574 6.969,1.189 H2.6@6.969,0.6 ; H2.6 H2.6@6.969,0.6 ; H2.6@6.969,0.6 6.696,0.327 6.696,0.873 H2.6@6.969,0.6
M4_D1: H1.11 IC1.42 | length 15.8
  Top Layer w0.254: IC1.42 10.019,8.508 10.399,8.128 10.436,8.165 11.664,8.165 11.676,8.177 11.733,8.177 12.146,8.177 12.196,8.227 12.656,8.227 13.221,8.792 13.221,10.329 12.954,10.596 12.954,11.429 12.975,11.45 12.975,11.621 12.975,11.894 13.359,12.278 v1(13.359,12.319)
  Bottom Layer w0.254: v1(13.359,12.319) 13.414,12.319 13.782,12.687 13.782,12.961 13.776,12.967 13.776,13.8 13.782,13.805 13.782,13.959 13.934,14.112 13.934,17.189 13.44,17.683 H1.11
M4_D2: H1.12 IC1.43 | length 17.8
  Top Layer w0.254: IC1.43 8.814,8.031 9.921,8.031 10.23,7.722 10.567,7.722 10.602,7.757 11.554,7.757 11.556,7.759 11.832,7.759 11.844,7.771 11.901,7.771 12.314,7.771 12.364,7.821 12.825,7.821 13.637,8.633 13.637,10.487 13.36,10.764 13.36,11.261 13.381,11.282 13.381,11.453 13.959,12.03 13.959,12.122 14.141,12.304 14.141,12.568 13.79,12.919 13.327,12.919 v1(13.117,13.129) v1@13.258,13.129
  Bottom Layer w0.254: H1.12 12.146,17.839 13.525,16.459 13.525,14.278 13.293,14.045 13.293,13.233 v1@13.189,13.129 ; v1(13.117,13.129) v1@13.189,13.129 ; v1@13.224,13.129 v1@13.189,13.129
M4_D7: H2.5 IC1.35 | length 19.8
  Top Layer w0.254: H2.5 5.867,0.192 5.867,1.716 5.415,2.167 4.811,2.167 4.626,1.983 3.268,1.983 2.326,2.925 2.326,8.056 3.033,8.763 5.515,8.763 7.093,10.341 7.093,11.411 7.69,12.008 IC1.35
NetC11_2: C11.2 IC1.4 Y2.2 | length 7
  Top Layer w0.254: IC1.4 20.337,6.938 21.292,6.938 22.155,6.075 24.423,6.075 24.796,5.702 24.796,5.359 24.935,5.22 25.54,5.22 C11.2
NetC12_2: C12.2 IC1.3 Y2.1 | length 5.5
  Top Layer w0.254: IC1.3 20.29,6.485 20.992,6.485 21.026,6.452 21.204,6.452 22.296,5.359 Y2.1 22.296,3.688 22.898,3.086 C12.2@23.33,3.086
NetC13_2: C13.2 IC1.6 Y1.3 | length 5.6
  Top Layer w0.254: IC1.6 20.29,7.985 21.193,7.985 21.526,8.319 21.526,9.063 22.097,9.633 22.197,9.633 22.67,10.106 Y1.3 22.67,10.306 23.241,10.877 C13.2
NetC14_2: C14.2 IC1.5 Y1.1 | length 6.8
  Top Layer w0.254: IC1.5 21.472,7.508 21.954,7.026 23.39,7.026 24.27,7.906 Y1.1 24.287,8.023 25.102,8.023 C14.2@26.01,8.931
NetC21_1: C21.1 Q1.1 R23.2 | length 3.2
  Top Layer w0.254: C21.1 2.515,14.421 R23.2 3.177,15.083 Q1.1
NetC21_2: C21.2 D21.2 R24.1 Z1.1 | length 4.9
  Top Layer w0.254: R24.1 0.934,13.341 C21.2 1.108,13.167 D21.2 1.108,9.779 Z1.1
P0_D1: H2.19 IC1.62 | length 10.3
  Top Layer w0.254: IC1.62 17.305,3.494 17.305,2.764 17.208,2.667 17.208,2.364 17.41,2.162 20.375,2.162 20.968,2.756 22.256,2.756 23.008,2.004 v1(23.008,1.964)
  Bottom Layer w0.254: v1@22.983,2.029 22.917,1.964 v1(23.008,1.964) 23.323,1.964 23.79,1.497 H2.19
P0_D2: H2.20 IC1.61 | length 11.9
  Top Layer w0.254: IC1.61 16.802,3.497 16.802,2.195 17.241,1.756 20.543,1.756 21.137,2.349 21.777,2.349 22.409,1.717 22.409,1.716 22.773,1.351 24.211,1.351 v1(24.524,1.664)
  Bottom Layer w0.254: v1(24.524,1.664) 25.084,1.103 H2.20
P0_D3: H2.21 IC1.11 | length 17.6
  Top Layer w0.254: IC1.11 20.29,10.531 21.301,10.531 21.79,11.021 21.954,11.185 22.174,11.405 v1(22.301,11.405)
  Bottom Layer w0.254: v1(22.301,11.405) 22.398,11.405 23.017,12.024 24.001,12.024 26.098,9.927 26.098,4.284 25.764,3.95 25.764,2.004 26.105,1.663 26.105,0.923 26.378,0.65 H2.21
RESET: IC1.7 Q1.3 R21.2 | length 21.4
  Top Layer w0.254: R21.2 6.087,14.665 6.087,14.306 6.26,14.133 Q1.3 ; v1(10.872,12.961) 12.101,12.961 12.884,13.744 13.583,13.744 14.106,13.222 14.106,13.212 14.547,12.77 14.547,12.135 14.365,11.953 14.365,11.457 14.716,11.105 14.757,11.105 15.408,10.454 15.408,10.09 16.99,8.508 IC1.7
  Bottom Layer w0.254: v1(6.744,14.148) 7.93,12.961 v1(10.872,12.961)
SW_CLK: IC1.49 P1.2 | length 13.2
  Top Layer w0.254: v1(8.294,4.886) 9.07,4.886 9.108,4.924 10.311,3.721 10.326,3.736 10.779,3.736 IC1.49
  Bottom Layer w0.254: P1.2 3.442,7.04 6.692,7.04 6.746,7.095 7.243,7.095 8.124,6.214 v1@8.124,5.071 ; v1@8.115,5.08 v1@8.124,5.071 ; v1@8.124,5.071 v1@8.271,4.924 ; v1@8.271,4.924 8.233,4.886 v1(8.294,4.886) 8.294,4.901 v1@8.271,4.924
SW_IO: IC1.46 P1.3 | length 8.9
  Top Layer w0.254: v1(6.444,7.64) 6.88,7.204 7.154,7.204 7.849,6.508 IC1.46
  Bottom Layer w0.254: P1.3 2.772,7.64 v1(6.444,7.64)
VCC2: H1.1 IC1.1 IC1.13 IC1.19 IC1.32 IC1.48 IC1.64 R11.2 R12.2 R21.1 | length 65.9
  Top Layer w0.254: R21.1 5.992,17.168 v1(7.825,17.168) ; R12.2@7.097,3.99 R12.2 ; R12.2@7.262,3.794 6.034,5.022 5.967,5.022 6.026,5.081 7.041,5.081 7.469,5.508 IC1.48 10.439,5.508 v1(10.455,5.524) ; IC1.32 10.779,16.06 v1(11.225,16.506) ; v1(13.809,6.838) 18.379,6.838 v1(18.956,6.261) 18.956,4.78 19.222,4.514 19.273,4.514 ; IC1.19 17.3,14.975 17.3,13.967 17.572,13.694 17.572,13.314 v1@17.766,13.121 ; v1@17.765,13.188 v1(17.765,13.207) ; v1@17.766,13.188 v1@17.766,13.121 ; v1@17.842,13.044 v1@17.766,13.121 ; IC1.64 18.279,3.879 18.302,3.902 18.661,3.902 19.273,4.514 ; v1(18.898,11.485) 20.244,11.485 IC1.13 20.278,11.52 21.061,11.52 21.284,11.743 21.284,12.143 26.378,17.238 H1.1 ; IC1.1 19.908,5.508 19.885,5.485 19.885,5.126 19.273,4.514
  Bottom Layer w0.254: v1(7.825,17.168) 8.35,17.168 9.874,15.644 10.982,15.644 11.225,15.887 ; v1(10.455,5.524) 10.601,5.67 10.601,5.746 10.602,5.745 11.436,5.745 11.437,5.746 12.56,5.746 13.004,6.191 13.464,6.191 13.809,6.536 v1(13.809,6.838) ; v1(11.225,16.506) 11.225,15.887 ; 17.384,11.831 17.384,11.334 17.635,11.083 17.654,11.083 17.735,11.001 18.232,11.001 18.244,11.014 18.335,10.923 ; 17.384,11.831 17.384,11.931 17.635,12.182 17.635,12.657 17.766,12.788 17.766,13.188 v1@17.699,13.121 ; v1@17.693,13.26 17.693,13.188 17.693,12.78 15.929,12.78 15.382,13.327 15.382,13.631 15.031,13.983 14.534,13.983 14.183,13.631 14.183,13.135 14.188,13.129 14.188,12.351 13.959,12.122 13.959,12.03 13.648,11.72 13.111,11.72 12.76,12.071 12.76,12.639 12.518,12.881 12.518,13.975 11.225,15.268 11.225,15.887 ; v1@17.765,13.188 v1(17.765,13.207) ; v1(18.898,11.485) 18.335,10.923 ; v1(18.956,6.261) 18.956,10.302 18.335,10.923
VCC3: H1.2 R111.2 R121.2 | length 42.8
  Top Layer w0.254: R111.2 4.304,6.133 4.169,6.268 5.85,7.949 6.141,8.239 7.046,8.239 7.266,8.019 v1(7.266,7.803) ; v1(10.867,4.815) 10.813,4.815 11.054,5.056 11.054,5.772 10.337,6.49 10.337,6.966 10.646,7.275 10.695,7.275 10.771,7.35 11.267,7.35 11.327,7.291 11.676,7.291 11.737,7.352 12.47,7.352 12.508,7.39 12.969,7.39 13.123,7.544 13.408,7.544 13.514,7.438 14.058,7.438 14.246,7.249 15.145,7.249 15.211,7.315 17.815,7.315 v1(18.332,7.832) ; v1(21.858,14.735) 22.826,14.735 25.084,16.993 H1.2
  Bottom Layer w0.254: v1@7.278,7.815 10.277,4.815 v1(10.867,4.815) ; v1(18.332,7.832) 18.327,7.827 18.327,5.582 18.652,5.257 19.846,5.257 19.995,5.406 19.995,14.164 20.566,14.735 v1(21.858,14.735)
pads on no net: H1.15 IC1.2 IC1.22 IC1.26 IC1.27 IC1.29 IC1.40 IC1.44 IC1.45 IC1.50

## Polygon pours and split planes (outlines as drawn)
no net on Bottom Layer "NONET_L02_P000" (solid, pour order 0): 0.254,18.161

## Silkscreen, mask and mechanical layers (free items; w line width, h text height)
Bottom Overlay:
  lines w1: 1.861,16.592 ccw(c1.363,16.545) 1.863,16.545
  text "MCU_M_V1" at 8.24,13.502 h1
Mechanical 1:
  pour cut-out: 5.339,12.008
  lines w0.2: 0,0 0,19 26.876,19 26.876,0 0,0